# EAGLE board RGB_PMOLED_0.6IN-Panel (EAGLE 9.0.1), part 1 of 2
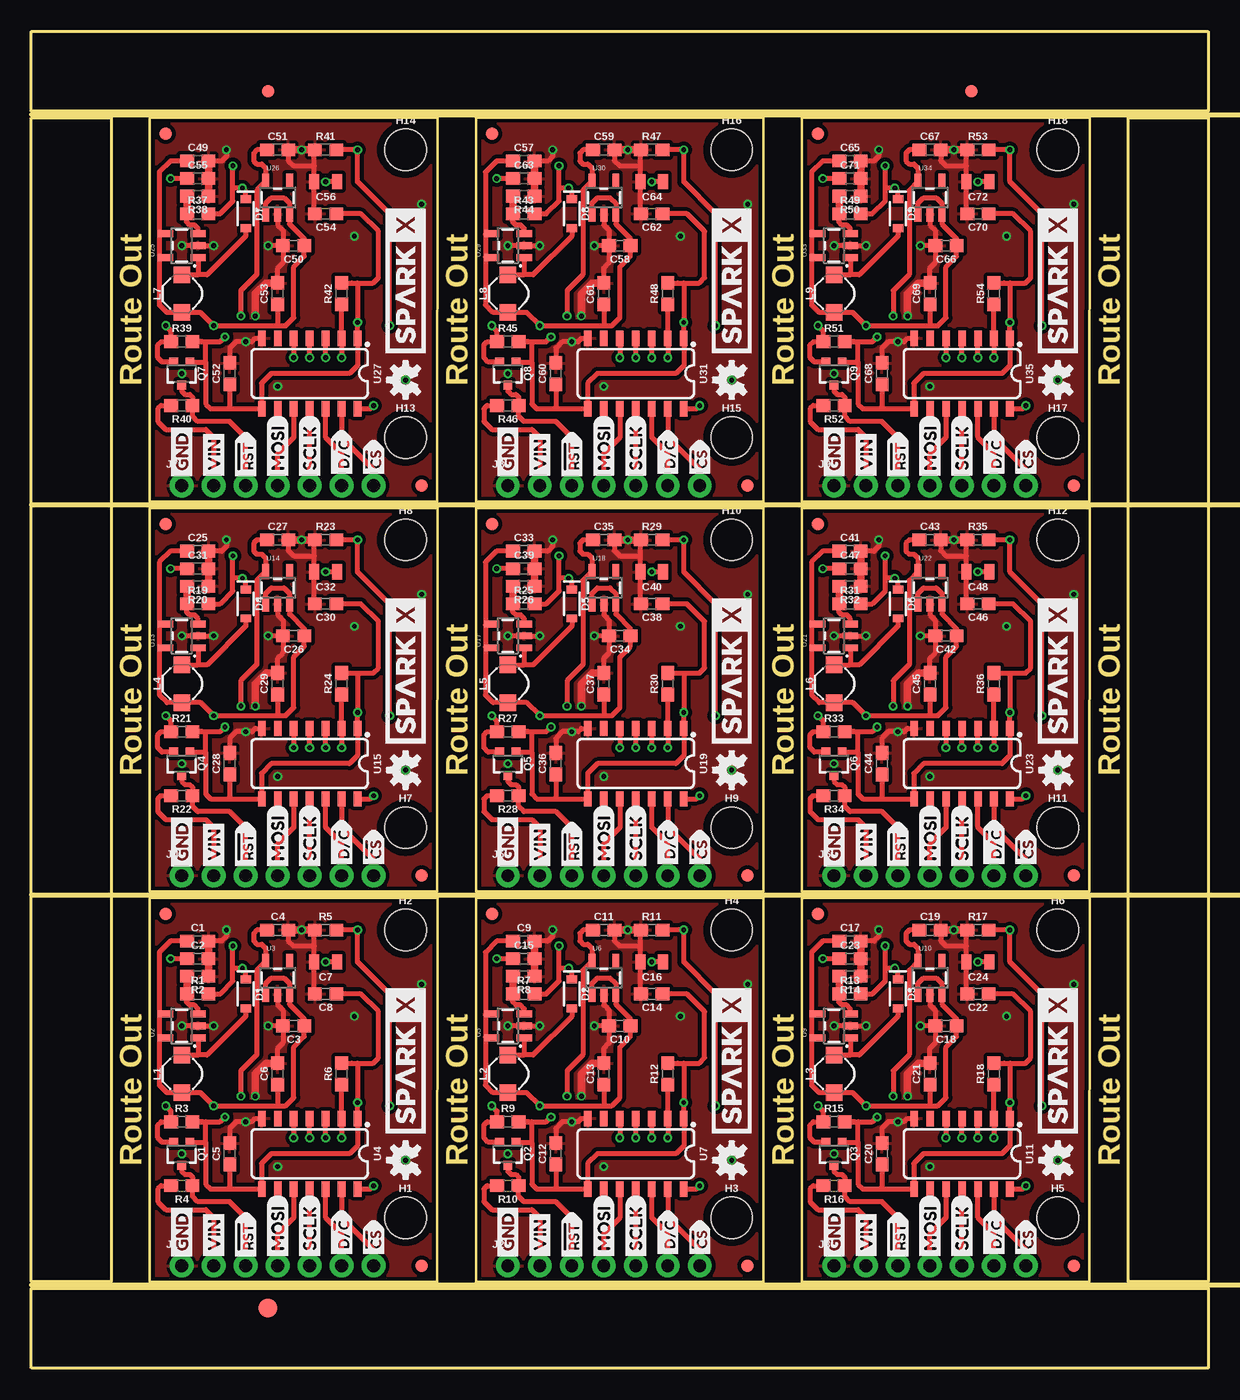
[diagram p0: board, top side]
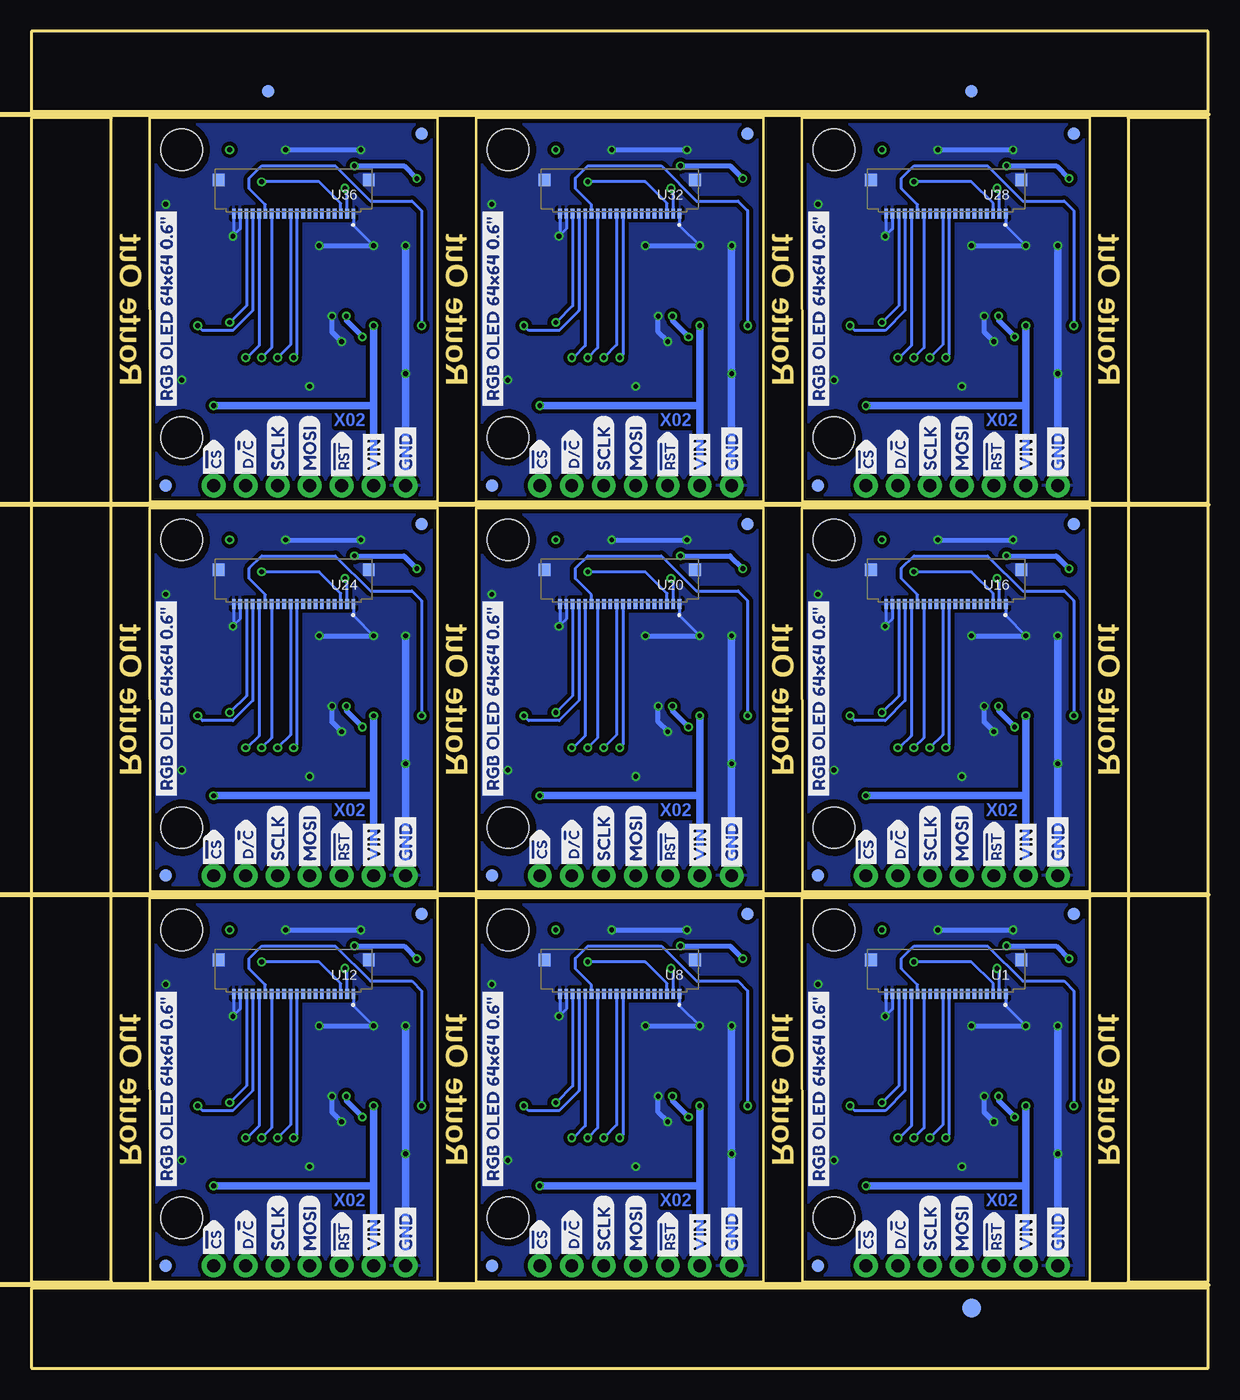
[diagram p1: board, bottom side, seen from below]

Size 93.47 x 106.17 mm. Coordinates in mm from the lower left corner, seen from the top.
Outline: 9.4,6.86 32.24,6.86 32.26,37.34 9.4,37.34 9.4,6.86
Outline: 35.31,6.86 58.15,6.86 58.17,37.34 35.31,37.34 35.31,6.86
Outline: 61.21,6.86 84.05,6.86 84.07,37.34 61.21,37.34 61.21,6.86
Outline: 9.4,37.85 32.24,37.85 32.26,68.33 9.4,68.33 9.4,37.85
Outline: 35.31,37.85 58.15,37.85 58.17,68.33 35.31,68.33 35.31,37.85
Outline: 61.21,37.85 84.05,37.85 84.07,68.33 61.21,68.33 61.21,37.85
Outline: 9.4,68.83 32.24,68.83 32.26,99.31 9.4,99.31 9.4,68.83
Outline: 35.31,68.83 58.15,68.83 58.17,99.31 35.31,99.31 35.31,68.83
Outline: 61.21,68.83 84.05,68.83 84.07,99.31 61.21,99.31 61.21,68.83
Outline: 0,6.35 93.47,6.35 93.47,0 0,0 0,6.35
Outline: 87.12,99.31 93.47,99.31 93.47,6.86 87.12,6.86 87.12,99.31
Outline: 0,106.17 93.47,106.17 93.47,99.82 0,99.82 0,106.17
Outline: 0,99.31 6.35,99.31 6.35,6.86 0,6.86 0,99.31
Copper layers (1*16): Top 0.035mm / dielectric 1.5mm / Bottom 0.035mm
Design rules "SparkFun-2-layer-PCBWay-LIMIT": minimum track width 6mil, minimum drill 0.3mm, track to track 6mil, track to pad 6mil, pad to pad 6mil, via to via 6mil, smd to smd 6mil, copper to edge 6mil, drill to drill 6mil, minimum pad ring 6mil, minimum via ring 6mil, stop-mask expansion 4mil, vias tented up to drill 25mil, thermal gap 10mil
Milling: 4 lines

## Footprints (pad centres in the part's own frame; a part is rotated, then mirrored left to right if it is on the bottom)
0603 = smd 1.1 x 1: 1 -0.85,0; 2 0.85,0
0805 = smd 0.8 x 1.2: 1 -0.9,0; 2 0.9,0
SOD-323 = smd 0.63 x 0.83: A 1.15,0; C -1.15,0
FIDUCIAL-1X2 = smd 1 x 1: 1 0,0
FIDUCIAL-1.5X3 = smd 1.5 x 1.5: 1 0,0
STAND-OFF = hole 3.302: 0,0
1X07_NO_SILK = drill 1.016 pad 1.88: 1 0,0; 2 2.54,0; 3 5.08,0; 4 7.62,0; 5 10.16,0; 6 12.7,0; 7 15.24,0
INDUCTOR_4.7UH = smd 1.3 x 1.3: P$1 -1.5,0; P$2 1.5,0
SOT323 = smd 0.7 x 0.7: 1 -0.65,-0.925; 2 0.65,-0.925; 3 0,0.925
AMPHENOL_10051922-2010ELF = smd 0.3 x 0.8: 1 -4.75,0; 2 -4.25,0; 3 -3.75,0; 4 -3.25,0; 5 -2.75,0; 6 -2.25,0; 7 -1.75,0; 8 -1.25,0; 9 -0.75,0; 10 -0.25,0; 11 0.25,0; 12 0.75,0; 13 1.25,0; 14 1.75,0; 15 2.25,0; 16 2.75,0; 17 3.25,0; 18 3.75,0; 19 4.25,0; 20 4.75,0 | smd 0.95 x 1: P$21 -5.975,-2.7; P$22 5.975,-2.7
SOT23-5 = smd 0.55 x 1.2: 1 -0.95,-1.3; 2 0,-1.3; 3 0.95,-1.3; 4 0.95,1.3; 5 -0.95,1.3
SO14 = smd 0.6 x 1.2: 1 -3.81,-2.8; 2 -2.54,-2.8; 3 -1.27,-2.8; 4 0,-2.8; 5 1.27,-2.8; 6 2.54,-2.8; 7 3.81,-2.8; 8 3.81,2.8; 9 2.54,2.8; 10 1.27,2.8; 11 0,2.8; 12 -1.27,2.8; 13 -2.54,2.8; 14 -3.81,2.8

## Placement (x,y rotation side)
C1  1.0uF  [0603]  13.21,33.91 0 top
C2  1.0uF  [0603]  13.21,32.51 0 top
C3  1.0uF  [0603]  20.83,27.18 180 top
C4  2.2uF  [0603]  19.56,34.8 0 top
C5  0.1uF  [0603]  15.75,17.02 90 top
C6  0.1uF  [0603]  19.56,23.37 90 top
C7  2.2uF  [0805]  23.37,32.26 180 top
C8  1.0uF  [0603]  23.37,29.72 180 top
C9  1.0uF  [0603]  39.12,33.91 0 top
C10  1.0uF  [0603]  46.74,27.18 180 top
C11  2.2uF  [0603]  45.47,34.8 0 top
C12  0.1uF  [0603]  41.66,17.02 90 top
C13  0.1uF  [0603]  45.47,23.37 90 top
C14  1.0uF  [0603]  49.28,29.72 180 top
C15  1.0uF  [0603]  39.12,32.51 0 top
C16  2.2uF  [0805]  49.28,32.26 180 top
C17  1.0uF  [0603]  65.02,33.91 0 top
C18  1.0uF  [0603]  72.64,27.18 180 top
C19  2.2uF  [0603]  71.37,34.8 0 top
C20  0.1uF  [0603]  67.56,17.02 90 top
C21  0.1uF  [0603]  71.37,23.37 90 top
C22  1.0uF  [0603]  75.18,29.72 180 top
C23  1.0uF  [0603]  65.02,32.51 0 top
C24  2.2uF  [0805]  75.18,32.26 180 top
C25  1.0uF  [0603]  13.21,64.9 0 top
C26  1.0uF  [0603]  20.83,58.17 180 top
C27  2.2uF  [0603]  19.56,65.79 0 top
C28  0.1uF  [0603]  15.75,48.01 90 top
C29  0.1uF  [0603]  19.56,54.36 90 top
C30  1.0uF  [0603]  23.37,60.71 180 top
C31  1.0uF  [0603]  13.21,63.5 0 top
C32  2.2uF  [0805]  23.37,63.25 180 top
C33  1.0uF  [0603]  39.12,64.9 0 top
C34  1.0uF  [0603]  46.74,58.17 180 top
C35  2.2uF  [0603]  45.47,65.79 0 top
C36  0.1uF  [0603]  41.66,48.01 90 top
C37  0.1uF  [0603]  45.47,54.36 90 top
C38  1.0uF  [0603]  49.28,60.71 180 top
C39  1.0uF  [0603]  39.12,63.5 0 top
C40  2.2uF  [0805]  49.28,63.25 180 top
C41  1.0uF  [0603]  65.02,64.9 0 top
C42  1.0uF  [0603]  72.64,58.17 180 top
C43  2.2uF  [0603]  71.37,65.79 0 top
C44  0.1uF  [0603]  67.56,48.01 90 top
C45  0.1uF  [0603]  71.37,54.36 90 top
C46  1.0uF  [0603]  75.18,60.71 180 top
C47  1.0uF  [0603]  65.02,63.5 0 top
C48  2.2uF  [0805]  75.18,63.25 180 top
C49  1.0uF  [0603]  13.21,95.89 0 top
C50  1.0uF  [0603]  20.83,89.15 180 top
C51  2.2uF  [0603]  19.56,96.77 0 top
C52  0.1uF  [0603]  15.75,78.99 90 top
C53  0.1uF  [0603]  19.56,85.34 90 top
C54  1.0uF  [0603]  23.37,91.69 180 top
C55  1.0uF  [0603]  13.21,94.49 0 top
C56  2.2uF  [0805]  23.37,94.23 180 top
C57  1.0uF  [0603]  39.12,95.89 0 top
C58  1.0uF  [0603]  46.74,89.15 180 top
C59  2.2uF  [0603]  45.47,96.77 0 top
C60  0.1uF  [0603]  41.66,78.99 90 top
C61  0.1uF  [0603]  45.47,85.34 90 top
C62  1.0uF  [0603]  49.28,91.69 180 top
C63  1.0uF  [0603]  39.12,94.49 0 top
C64  2.2uF  [0805]  49.28,94.23 180 top
C65  1.0uF  [0603]  65.02,95.89 0 top
C66  1.0uF  [0603]  72.64,89.15 180 top
C67  2.2uF  [0603]  71.37,96.77 0 top
C68  0.1uF  [0603]  67.56,78.99 90 top
C69  0.1uF  [0603]  71.37,85.34 90 top
C70  1.0uF  [0603]  75.18,91.69 180 top
C71  1.0uF  [0603]  65.02,94.49 0 top
C72  2.2uF  [0805]  75.18,94.23 180 top
D1  1A/23V/620mV  [SOD-323]  17.02,29.72 270 top
D2  1A/23V/620mV  [SOD-323]  42.93,29.72 270 top
D3  1A/23V/620mV  [SOD-323]  68.83,29.72 270 top
D4  1A/23V/620mV  [SOD-323]  17.02,60.71 270 top
D5  1A/23V/620mV  [SOD-323]  42.93,60.71 270 top
D6  1A/23V/620mV  [SOD-323]  68.83,60.71 270 top
D7  1A/23V/620mV  [SOD-323]  17.02,91.69 270 top
D8  1A/23V/620mV  [SOD-323]  42.93,91.69 270 top
D9  1A/23V/620mV  [SOD-323]  68.83,91.69 270 top
E$1  [FIDUCIAL-1X2]  18.8,101.41 0 top
E$2  [FIDUCIAL-1X2]  18.8,101.41 0 bottom
E$3  [FIDUCIAL-1X2]  74.68,101.41 0 top
E$4  [FIDUCIAL-1X2]  74.68,101.41 0 bottom
E$5  [FIDUCIAL-1.5X3]  18.8,4.76 0 top
E$6  [FIDUCIAL-1.5X3]  18.8,4.76 0 bottom
FD1  FIDUCIAL1X2  [FIDUCIAL-1X2]  10.67,36.07 0 top
FD2  FIDUCIAL1X2  [FIDUCIAL-1X2]  30.99,8.13 0 top
FD3  FIDUCIAL1X2  [FIDUCIAL-1X2]  30.99,8.13 0 bottom
FD4  FIDUCIAL1X2  [FIDUCIAL-1X2]  10.67,36.07 0 bottom
FD5  FIDUCIAL1X2  [FIDUCIAL-1X2]  36.58,36.07 0 top
FD6  FIDUCIAL1X2  [FIDUCIAL-1X2]  56.9,8.13 0 top
FD7  FIDUCIAL1X2  [FIDUCIAL-1X2]  56.9,8.13 0 bottom
FD8  FIDUCIAL1X2  [FIDUCIAL-1X2]  36.58,36.07 0 bottom
FD9  FIDUCIAL1X2  [FIDUCIAL-1X2]  62.48,36.07 0 top
FD10  FIDUCIAL1X2  [FIDUCIAL-1X2]  82.8,8.13 0 top
FD11  FIDUCIAL1X2  [FIDUCIAL-1X2]  82.8,8.13 0 bottom
FD12  FIDUCIAL1X2  [FIDUCIAL-1X2]  62.48,36.07 0 bottom
FD13  FIDUCIAL1X2  [FIDUCIAL-1X2]  10.67,67.06 0 top
FD14  FIDUCIAL1X2  [FIDUCIAL-1X2]  30.99,39.12 0 top
FD15  FIDUCIAL1X2  [FIDUCIAL-1X2]  30.99,39.12 0 bottom
FD16  FIDUCIAL1X2  [FIDUCIAL-1X2]  10.67,67.06 0 bottom
FD17  FIDUCIAL1X2  [FIDUCIAL-1X2]  36.58,67.06 0 top
FD18  FIDUCIAL1X2  [FIDUCIAL-1X2]  56.9,39.12 0 top
FD19  FIDUCIAL1X2  [FIDUCIAL-1X2]  56.9,39.12 0 bottom
FD20  FIDUCIAL1X2  [FIDUCIAL-1X2]  36.58,67.06 0 bottom
FD21  FIDUCIAL1X2  [FIDUCIAL-1X2]  62.48,67.06 0 top
FD22  FIDUCIAL1X2  [FIDUCIAL-1X2]  82.8,39.12 0 top
FD23  FIDUCIAL1X2  [FIDUCIAL-1X2]  82.8,39.12 0 bottom
FD24  FIDUCIAL1X2  [FIDUCIAL-1X2]  62.48,67.06 0 bottom
FD25  FIDUCIAL1X2  [FIDUCIAL-1X2]  10.67,98.04 0 top
FD26  FIDUCIAL1X2  [FIDUCIAL-1X2]  30.99,70.1 0 top
FD27  FIDUCIAL1X2  [FIDUCIAL-1X2]  30.99,70.1 0 bottom
FD28  FIDUCIAL1X2  [FIDUCIAL-1X2]  10.67,98.04 0 bottom
FD29  FIDUCIAL1X2  [FIDUCIAL-1X2]  36.58,98.04 0 top
FD30  FIDUCIAL1X2  [FIDUCIAL-1X2]  56.9,70.1 0 top
FD31  FIDUCIAL1X2  [FIDUCIAL-1X2]  56.9,70.1 0 bottom
FD32  FIDUCIAL1X2  [FIDUCIAL-1X2]  36.58,98.04 0 bottom
FD33  FIDUCIAL1X2  [FIDUCIAL-1X2]  62.48,98.04 0 top
FD34  FIDUCIAL1X2  [FIDUCIAL-1X2]  82.8,70.1 0 top
FD35  FIDUCIAL1X2  [FIDUCIAL-1X2]  82.8,70.1 0 bottom
FD36  FIDUCIAL1X2  [FIDUCIAL-1X2]  62.48,98.04 0 bottom
H1  STAND-OFF  [STAND-OFF]  29.72,11.94 0 top
H2  STAND-OFF  [STAND-OFF]  29.72,34.8 0 top
H3  STAND-OFF  [STAND-OFF]  55.63,11.94 0 top
H4  STAND-OFF  [STAND-OFF]  55.63,34.8 0 top
H5  STAND-OFF  [STAND-OFF]  81.53,11.94 0 top
H6  STAND-OFF  [STAND-OFF]  81.53,34.8 0 top
H7  STAND-OFF  [STAND-OFF]  29.72,42.93 0 top
H8  STAND-OFF  [STAND-OFF]  29.72,65.79 0 top
H9  STAND-OFF  [STAND-OFF]  55.63,42.93 0 top
H10  STAND-OFF  [STAND-OFF]  55.63,65.79 0 top
H11  STAND-OFF  [STAND-OFF]  81.53,42.93 0 top
H12  STAND-OFF  [STAND-OFF]  81.53,65.79 0 top
H13  STAND-OFF  [STAND-OFF]  29.72,73.91 0 top
H14  STAND-OFF  [STAND-OFF]  29.72,96.77 0 top
H15  STAND-OFF  [STAND-OFF]  55.63,73.91 0 top
H16  STAND-OFF  [STAND-OFF]  55.63,96.77 0 top
H17  STAND-OFF  [STAND-OFF]  81.53,73.91 0 top
H18  STAND-OFF  [STAND-OFF]  81.53,96.77 0 top
J1  [1X07_NO_SILK]  11.94,8.13 0 top
J2  [1X07_NO_SILK]  37.85,8.13 0 top
J3  [1X07_NO_SILK]  63.75,8.13 0 top
J4  [1X07_NO_SILK]  11.94,39.12 0 top
J5  [1X07_NO_SILK]  37.85,39.12 0 top
J6  [1X07_NO_SILK]  63.75,39.12 0 top
J7  [1X07_NO_SILK]  11.94,70.1 0 top
J8  [1X07_NO_SILK]  37.85,70.1 0 top
J9  [1X07_NO_SILK]  63.75,70.1 0 top
L1  10uH  [INDUCTOR_4.7UH]  11.94,23.37 90 top
L2  10uH  [INDUCTOR_4.7UH]  37.85,23.37 90 top
L3  10uH  [INDUCTOR_4.7UH]  63.75,23.37 90 top
L4  10uH  [INDUCTOR_4.7UH]  11.94,54.36 90 top
L5  10uH  [INDUCTOR_4.7UH]  37.85,54.36 90 top
L6  10uH  [INDUCTOR_4.7UH]  63.75,54.36 90 top
L7  10uH  [INDUCTOR_4.7UH]  11.94,85.34 90 top
L8  10uH  [INDUCTOR_4.7UH]  37.85,85.34 90 top
L9  10uH  [INDUCTOR_4.7UH]  63.75,85.34 90 top
LOGO1  SPARKX-LOGO5  [SPARKX-LARGE]  29.72,24.38 90 top
LOGO2  OSHW-LOGOS  [OSHW-LOGO-S]  29.72,16.51 90 top
LOGO3  SPARKX-LOGO5  [SPARKX-LARGE]  55.63,24.38 90 top
LOGO4  OSHW-LOGOS  [OSHW-LOGO-S]  55.63,16.51 90 top
LOGO5  SPARKX-LOGO5  [SPARKX-LARGE]  81.53,24.38 90 top
LOGO6  OSHW-LOGOS  [OSHW-LOGO-S]  81.53,16.51 90 top
LOGO7  SPARKX-LOGO5  [SPARKX-LARGE]  29.72,55.37 90 top
LOGO8  OSHW-LOGOS  [OSHW-LOGO-S]  29.72,47.5 90 top
LOGO9  SPARKX-LOGO5  [SPARKX-LARGE]  55.63,55.37 90 top
LOGO10  OSHW-LOGOS  [OSHW-LOGO-S]  55.63,47.5 90 top
LOGO11  SPARKX-LOGO5  [SPARKX-LARGE]  81.53,55.37 90 top
LOGO12  OSHW-LOGOS  [OSHW-LOGO-S]  81.53,47.5 90 top
LOGO13  SPARKX-LOGO5  [SPARKX-LARGE]  29.72,86.36 90 top
LOGO14  OSHW-LOGOS  [OSHW-LOGO-S]  29.72,78.49 90 top
LOGO15  SPARKX-LOGO5  [SPARKX-LARGE]  55.63,86.36 90 top
LOGO16  OSHW-LOGOS  [OSHW-LOGO-S]  55.63,78.49 90 top
LOGO17  SPARKX-LOGO5  [SPARKX-LARGE]  81.53,86.36 90 top
LOGO18  OSHW-LOGOS  [OSHW-LOGO-S]  81.53,78.49 90 top
Q1  310mA/60V/1.6Ω  [SOT323]  11.94,17.02 180 top
Q2  310mA/60V/1.6Ω  [SOT323]  37.85,17.02 180 top
Q3  310mA/60V/1.6Ω  [SOT323]  63.75,17.02 180 top
Q4  310mA/60V/1.6Ω  [SOT323]  11.94,48.01 180 top
Q5  310mA/60V/1.6Ω  [SOT323]  37.85,48.01 180 top
Q6  310mA/60V/1.6Ω  [SOT323]  63.75,48.01 180 top
Q7  310mA/60V/1.6Ω  [SOT323]  11.94,78.99 180 top
Q8  310mA/60V/1.6Ω  [SOT323]  37.85,78.99 180 top
Q9  310mA/60V/1.6Ω  [SOT323]  63.75,78.99 180 top
R1  47k  [0603]  13.21,29.72 0 top
R2  5.6k  [0603]  13.21,31.12 180 top
R3  10k  [0603]  11.94,19.56 0 top
R4  10k  [0603]  11.94,14.48 180 top
R5  390k  [0603]  23.37,34.8 0 top
R6  10k  [0603]  24.64,23.37 90 top
R7  47k  [0603]  39.12,29.72 0 top
R8  5.6k  [0603]  39.12,31.12 180 top
R9  10k  [0603]  37.85,19.56 0 top
R10  10k  [0603]  37.85,14.48 180 top
R11  390k  [0603]  49.28,34.8 0 top
R12  10k  [0603]  50.55,23.37 90 top
R13  47k  [0603]  65.02,29.72 0 top
R14  5.6k  [0603]  65.02,31.12 180 top
R15  10k  [0603]  63.75,19.56 0 top
R16  10k  [0603]  63.75,14.48 180 top
R17  390k  [0603]  75.18,34.8 0 top
R18  10k  [0603]  76.45,23.37 90 top
R19  47k  [0603]  13.21,60.71 0 top
R20  5.6k  [0603]  13.21,62.1 180 top
R21  10k  [0603]  11.94,50.55 0 top
R22  10k  [0603]  11.94,45.47 180 top
R23  390k  [0603]  23.37,65.79 0 top
R24  10k  [0603]  24.64,54.36 90 top
R25  47k  [0603]  39.12,60.71 0 top
R26  5.6k  [0603]  39.12,62.1 180 top
R27  10k  [0603]  37.85,50.55 0 top
R28  10k  [0603]  37.85,45.47 180 top
R29  390k  [0603]  49.28,65.79 0 top
R30  10k  [0603]  50.55,54.36 90 top
R31  47k  [0603]  65.02,60.71 0 top
R32  5.6k  [0603]  65.02,62.1 180 top
R33  10k  [0603]  63.75,50.55 0 top
R34  10k  [0603]  63.75,45.47 180 top
R35  390k  [0603]  75.18,65.79 0 top
R36  10k  [0603]  76.45,54.36 90 top
R37  47k  [0603]  13.21,91.69 0 top
R38  5.6k  [0603]  13.21,93.09 180 top
R39  10k  [0603]  11.94,81.53 0 top
R40  10k  [0603]  11.94,76.45 180 top
R41  390k  [0603]  23.37,96.77 0 top
R42  10k  [0603]  24.64,85.34 90 top
R43  47k  [0603]  39.12,91.69 0 top
R44  5.6k  [0603]  39.12,93.09 180 top
R45  10k  [0603]  37.85,81.53 0 top
R46  10k  [0603]  37.85,76.45 180 top
R47  390k  [0603]  49.28,96.77 0 top
R48  10k  [0603]  50.55,85.34 90 top
R49  47k  [0603]  65.02,91.69 0 top
R50  5.6k  [0603]  65.02,93.09 180 top
R51  10k  [0603]  63.75,81.53 0 top
R52  10k  [0603]  63.75,76.45 180 top
R53  390k  [0603]  75.18,96.77 0 top
R54  10k  [0603]  76.45,85.34 90 top
U1  UG-6464TDDBG01  [AMPHENOL_10051922-2010ELF]  20.83,29.72 180 bottom
U2  AP3012  [SOT23-5]  11.94,27.18 90 top
U3  3.3V  [SOT23-5]  19.56,30.99 0 top
U4  TXB0104  [SO14]  22.1,17.02 180 top
U5  AP3012  [SOT23-5]  37.85,27.18 90 top
U6  3.3V  [SOT23-5]  45.47,30.99 0 top
U7  TXB0104  [SO14]  48.01,17.02 180 top
U8  UG-6464TDDBG01  [AMPHENOL_10051922-2010ELF]  46.74,29.72 180 bottom
U9  AP3012  [SOT23-5]  63.75,27.18 90 top
U10  3.3V  [SOT23-5]  71.37,30.99 0 top
U11  TXB0104  [SO14]  73.91,17.02 180 top
U12  UG-6464TDDBG01  [AMPHENOL_10051922-2010ELF]  72.64,29.72 180 bottom
U13  AP3012  [SOT23-5]  11.94,58.17 90 top
U14  3.3V  [SOT23-5]  19.56,61.98 0 top
U15  TXB0104  [SO14]  22.1,48.01 180 top
U16  UG-6464TDDBG01  [AMPHENOL_10051922-2010ELF]  20.83,60.71 180 bottom
U17  AP3012  [SOT23-5]  37.85,58.17 90 top
U18  3.3V  [SOT23-5]  45.47,61.98 0 top
U19  TXB0104  [SO14]  48.01,48.01 180 top
U20  UG-6464TDDBG01  [AMPHENOL_10051922-2010ELF]  46.74,60.71 180 bottom
U21  AP3012  [SOT23-5]  63.75,58.17 90 top
U22  3.3V  [SOT23-5]  71.37,61.98 0 top
U23  TXB0104  [SO14]  73.91,48.01 180 top
U24  UG-6464TDDBG01  [AMPHENOL_10051922-2010ELF]  72.64,60.71 180 bottom
U25  AP3012  [SOT23-5]  11.94,89.15 90 top
U26  3.3V  [SOT23-5]  19.56,92.96 0 top
U27  TXB0104  [SO14]  22.1,78.99 180 top
U28  UG-6464TDDBG01  [AMPHENOL_10051922-2010ELF]  20.83,91.69 180 bottom
U29  AP3012  [SOT23-5]  37.85,89.15 90 top
U30  3.3V  [SOT23-5]  45.47,92.96 0 top
U31  TXB0104  [SO14]  48.01,78.99 180 top
U32  UG-6464TDDBG01  [AMPHENOL_10051922-2010ELF]  46.74,91.69 180 bottom
U33  AP3012  [SOT23-5]  63.75,89.15 90 top
U34  3.3V  [SOT23-5]  71.37,92.96 0 top
U35  TXB0104  [SO14]  73.91,78.99 180 top
U36  UG-6464TDDBG01  [AMPHENOL_10051922-2010ELF]  72.64,91.69 180 bottom
U$1  [VIN0]  14.48,8.38 90 top
U$2  [VIN0]  14.48,8.38 90 bottom
U$3  [MOSI1]  19.56,8.38 90 bottom
U$4  [MOSI1]  19.56,8.38 90 top
U$5  [SCLK2]  22.1,8.38 90 top
U$6  [SCLK2]  22.1,8.38 90 bottom
U$7  [GND1]  11.94,8.38 90 top
U$8  [GND1]  11.94,8.38 90 bottom
U$9  [D##C5]  24.64,8.38 90 top
U$10  [#RST0]  17.02,8.25 90 top
U$11  [#RST0]  17.02,8.25 90 bottom
U$12  [#CS6]  27.18,8.38 90 top
U$13  [#CS6]  27.18,8.38 90 bottom
U$14  [D##C5]  24.64,8.38 90 bottom
U$15  [VIN0]  40.39,8.38 90 top
U$16  [RGB_OLED_64X64_0#6#7]  30.93,13.96 90 bottom
U$17  [VIN0]  40.39,8.38 90 bottom
U$18  [GND1]  37.85,8.38 90 top
U$19  [GND1]  37.85,8.38 90 bottom
U$20  [#CS6]  53.09,8.38 90 top
U$21  [#CS6]  53.09,8.38 90 bottom
U$22  [D##C5]  50.55,8.38 90 bottom
U$23  [D##C5]  50.55,8.38 90 top
U$24  [RGB_OLED_64X64_0#6#7]  56.84,13.96 90 bottom
U$25  [#RST0]  42.93,8.25 90 top
U$26  [#RST0]  42.93,8.25 90 bottom
U$27  [MOSI1]  45.47,8.38 90 bottom
U$28  [MOSI1]  45.47,8.38 90 top
U$29  [SCLK2]  48.01,8.38 90 top
U$30  [SCLK2]  48.01,8.38 90 bottom
U$31  [VIN0]  66.29,8.38 90 top
U$32  [VIN0]  66.29,8.38 90 bottom
U$33  [GND1]  63.75,8.38 90 top
U$34  [GND1]  63.75,8.38 90 bottom
U$35  [#CS6]  78.99,8.38 90 top
U$36  [#CS6]  78.99,8.38 90 bottom
U$37  [D##C5]  76.45,8.38 90 bottom
U$38  [D##C5]  76.45,8.38 90 top
U$39  [RGB_OLED_64X64_0#6#7]  82.74,13.96 90 bottom
U$40  [#RST0]  68.83,8.25 90 top
U$41  [#RST0]  68.83,8.25 90 bottom
U$42  [MOSI1]  71.37,8.38 90 bottom
U$43  [MOSI1]  71.37,8.38 90 top
U$44  [SCLK2]  73.91,8.38 90 top
U$45  [SCLK2]  73.91,8.38 90 bottom
U$46  [VIN0]  14.48,39.37 90 top
U$47  [VIN0]  14.48,39.37 90 bottom
U$48  [GND1]  11.94,39.37 90 top
U$49  [GND1]  11.94,39.37 90 bottom
U$50  [#CS6]  27.18,39.37 90 top
U$51  [#CS6]  27.18,39.37 90 bottom
U$52  [D##C5]  24.64,39.37 90 bottom
U$53  [D##C5]  24.64,39.37 90 top
U$54  [RGB_OLED_64X64_0#6#7]  30.93,44.95 90 bottom
U$55  [#RST0]  17.02,39.24 90 top
U$56  [#RST0]  17.02,39.24 90 bottom
U$57  [MOSI1]  19.56,39.37 90 bottom
U$58  [MOSI1]  19.56,39.37 90 top
U$59  [SCLK2]  22.1,39.37 90 top
U$60  [SCLK2]  22.1,39.37 90 bottom
U$61  [VIN0]  40.39,39.37 90 top
U$62  [VIN0]  40.39,39.37 90 bottom
U$63  [GND1]  37.85,39.37 90 top
U$64  [GND1]  37.85,39.37 90 bottom
U$65  [#CS6]  53.09,39.37 90 top
U$66  [#CS6]  53.09,39.37 90 bottom
U$67  [D##C5]  50.55,39.37 90 bottom
U$68  [D##C5]  50.55,39.37 90 top
U$69  [RGB_OLED_64X64_0#6#7]  56.84,44.95 90 bottom
U$70  [#RST0]  42.93,39.24 90 top
U$71  [#RST0]  42.93,39.24 90 bottom
U$72  [MOSI1]  45.47,39.37 90 bottom
U$73  [MOSI1]  45.47,39.37 90 top
U$74  [SCLK2]  48.01,39.37 90 top
U$75  [SCLK2]  48.01,39.37 90 bottom
U$76  [VIN0]  66.29,39.37 90 top
U$77  [VIN0]  66.29,39.37 90 bottom
U$78  [GND1]  63.75,39.37 90 top
U$79  [GND1]  63.75,39.37 90 bottom
U$80  [#CS6]  78.99,39.37 90 top
U$81  [#CS6]  78.99,39.37 90 bottom
U$82  [D##C5]  76.45,39.37 90 bottom
U$83  [D##C5]  76.45,39.37 90 top
U$84  [RGB_OLED_64X64_0#6#7]  82.74,44.95 90 bottom
U$85  [#RST0]  68.83,39.24 90 top
U$86  [#RST0]  68.83,39.24 90 bottom
U$87  [MOSI1]  71.37,39.37 90 bottom
U$88  [MOSI1]  71.37,39.37 90 top
U$89  [SCLK2]  73.91,39.37 90 top
U$90  [SCLK2]  73.91,39.37 90 bottom
U$91  [VIN0]  14.48,70.36 90 top
U$92  [VIN0]  14.48,70.36 90 bottom
U$93  [GND1]  11.94,70.36 90 top
U$94  [GND1]  11.94,70.36 90 bottom
U$95  [#CS6]  27.18,70.36 90 top
U$96  [#CS6]  27.18,70.36 90 bottom
U$97  [D##C5]  24.64,70.36 90 bottom
U$98  [D##C5]  24.64,70.36 90 top
U$99  [RGB_OLED_64X64_0#6#7]  30.93,75.94 90 bottom
U$100  [#RST0]  17.02,70.23 90 top
U$101  [#RST0]  17.02,70.23 90 bottom
U$102  [MOSI1]  19.56,70.36 90 bottom
U$103  [MOSI1]  19.56,70.36 90 top
U$104  [SCLK2]  22.1,70.36 90 top
U$105  [SCLK2]  22.1,70.36 90 bottom
U$106  [VIN0]  40.39,70.36 90 top
U$107  [VIN0]  40.39,70.36 90 bottom
U$108  [GND1]  37.85,70.36 90 top
U$109  [GND1]  37.85,70.36 90 bottom
U$110  [#CS6]  53.09,70.36 90 top
U$111  [#CS6]  53.09,70.36 90 bottom
U$112  [D##C5]  50.55,70.36 90 bottom
U$113  [D##C5]  50.55,70.36 90 top
U$114  [RGB_OLED_64X64_0#6#7]  56.84,75.94 90 bottom
U$115  [#RST0]  42.93,70.23 90 top
U$116  [#RST0]  42.93,70.23 90 bottom
U$117  [MOSI1]  45.47,70.36 90 bottom
U$118  [MOSI1]  45.47,70.36 90 top
U$119  [SCLK2]  48.01,70.36 90 top
U$120  [SCLK2]  48.01,70.36 90 bottom
U$121  [VIN0]  66.29,70.36 90 top
U$122  [VIN0]  66.29,70.36 90 bottom
U$123  [GND1]  63.75,70.36 90 top
U$124  [GND1]  63.75,70.36 90 bottom
U$125  [#CS6]  78.99,70.36 90 top
U$126  [#CS6]  78.99,70.36 90 bottom
U$127  [D##C5]  76.45,70.36 90 bottom
U$128  [D##C5]  76.45,70.36 90 top
U$129  [RGB_OLED_64X64_0#6#7]  82.74,75.94 90 bottom
U$130  [#RST0]  68.83,70.23 90 top
U$131  [#RST0]  68.83,70.23 90 bottom
U$132  [MOSI1]  71.37,70.36 90 bottom
U$133  [MOSI1]  71.37,70.36 90 top
U$134  [SCLK2]  73.91,70.36 90 top
U$135  [SCLK2]  73.91,70.36 90 bottom

## Library data of the parts
C1-C3 C8-C10 C14 C15 C17 C18 C22 C23 C25 C26 C30 C31 C33 C34 C38 C39 C41 C42 C46 C47 C49 C50 C54 C55 C57 C58 C62 C63 C65 C66 C70 C71 = SparkFun-Capacitors; PROD_ID: CAP-00868
C4 C11 C19 C27 C35 C43 C51 C59 C67 = SparkFun-Capacitors; PROD_ID: CAP-07888
C5 C6 C12 C13 C20 C21 C28 C29 C36 C37 C44 C45 C52 C53 C60 C61 C68 C69 = SparkFun-Capacitors; PROD_ID: CAP-00810
C7 C16 C24 C32 C40 C48 C56 C64 C72 = SparkFun-Capacitors; PROD_ID: CAP-11624
D1-D9 = SparkFun-DiscreteSemi; PROD_ID: DIO-11623
E$1-E$4 FD1-FD36 LOGO2 LOGO4 LOGO6 LOGO8 LOGO10 LOGO12 LOGO14 LOGO16 LOGO18 = SparkFun-Aesthetics
E$5 E$6 = SparkFun-Retired
H1-H18 = SparkFun-Hardware
J1-J9 = SparkFun-Connectors
L1-L9 = SparkFun-Coils; PROD_ID: NDUC-13968
LOGO1 LOGO3 LOGO5 LOGO7 LOGO9 LOGO11 LOGO13 LOGO15 LOGO17 = 1.81_Greyscale_OLED_Breakout
Q1-Q9 = SparkFun-DiscreteSemi; PROD_ID: TRANS-11151
R1 R7 R13 R19 R25 R31 R37 R43 R49 = SparkFun-Resistors; PROD_ID: RES-07871
R2 R8 R14 R20 R26 R32 R38 R44 R50 = SparkFun-Resistors; PROD_ID: RES-12378
R3 R4 R6 R9 R10 R12 R15 R16 R18 R21 R22 R24 R27 R28 R30 R33 R34 R36 R39 R40 R42 R45 R46 R48 R51 R52 R54 = SparkFun-Resistors; PROD_ID: RES-00824
R5 R11 R17 R23 R29 R35 R41 R47 R53 = SparkFun-Resistors; PROD_ID: RES-12024
U1 U8 U12 U16 U20 U24 U28 U32 U36 = RGB_OLED
U2 U5 U9 U13 U17 U21 U25 U29 U33 = SparkFun-IC-Power; PROD_ID: VREG-13911
U3 U6 U10 U14 U18 U22 U26 U30 U34 = SparkFun-IC-Power; PROD_ID: VREG-12457
U4 U7 U11 U15 U19 U23 U27 U31 U35 = SparkFun-IC-Comms; PROD_ID: IC-11329
U$1-U$135 = buzzard_labels

## Nets
3.3V: C4.1 C5.1 C8.1 Q1.1 R3.2 R6.2 U1.18 U3.5 U4.1 U4.8
3.3V1: C11.1 C12.1 C14.1 Q2.1 R9.2 R12.2 U6.5 U7.1 U7.8 U8.18
3.3V2: C19.1 C20.1 C22.1 Q3.1 R15.2 R18.2 U10.5 U11.1 U11.8 U12.18
3.3V3: C27.1 C28.1 C30.1 Q4.1 R21.2 R24.2 U14.5 U15.1 U15.8 U16.18
3.3V4: C35.1 C36.1 C38.1 Q5.1 R27.2 R30.2 U18.5 U19.1 U19.8 U20.18
3.3V5: C43.1 C44.1 C46.1 Q6.1 R33.2 R36.2 U22.5 U23.1 U23.8 U24.18
3.3V6: C51.1 C52.1 C54.1 Q7.1 R39.2 R42.2 U26.5 U27.1 U27.8 U28.18
3.3V7: C59.1 C60.1 C62.1 Q8.1 R45.2 R48.2 U30.5 U31.1 U31.8 U32.18
3.3V8: C67.1 C68.1 C70.1 Q9.1 R51.2 R54.2 U34.5 U35.1 U35.8 U36.18
12V: C2.1 D1.C R1.2 U1.2
12V1: C15.1 D2.C R7.2 U8.2
12V2: C23.1 D3.C R13.2 U12.2
12V3: C31.1 D4.C R19.2 U16.2
12V4: C39.1 D5.C R25.2 U20.2
12V5: C47.1 D6.C R31.2 U24.2
12V6: C55.1 D7.C R37.2 U28.2
12V7: C63.1 D8.C R43.2 U32.2
12V8: C71.1 D9.C R49.2 U36.2
!CS: R6.1 U1.16 U4.2
!CS1: R12.1 U7.2 U8.16
!CS2: R18.1 U11.2 U12.16
!CS3: R24.1 U15.2 U16.16
!CS4: R30.1 U19.2 U20.16
!CS5: R36.1 U23.2 U24.16
!CS6: R42.1 U27.2 U28.16
!CS7: R48.1 U31.2 U32.16
!CS8: R54.1 U35.2 U36.16
!CS!_HIGH: J1.7 U4.13
!CS!_HIGH1: J2.7 U7.13
!CS!_HIGH2: J3.7 U11.13
!CS!_HIGH3: J4.7 U15.13
!CS!_HIGH4: J5.7 U19.13
!CS!_HIGH5: J6.7 U23.13
!CS!_HIGH6: J7.7 U27.13
!CS!_HIGH7: J8.7 U31.13
!CS!_HIGH8: J9.7 U35.13
!RES: Q1.2 R3.1 U1.15
!RES1: Q2.2 R9.1 U8.15
!RES2: Q3.2 R15.1 U12.15
!RES3: Q4.2 R21.1 U16.15
!RES4: Q5.2 R27.1 U20.15
!RES5: Q6.2 R33.1 U24.15
!RES6: Q7.2 R39.1 U28.15
!RES7: Q8.2 R45.1 U32.15
!RES8: Q9.2 R51.1 U36.15
!RES!_HIGH: J1.3 Q1.3 R4.1
!RES!_HIGH1: J2.3 Q2.3 R10.1
!RES!_HIGH2: J3.3 Q3.3 R16.1
!RES!_HIGH3: J4.3 Q4.3 R22.1
!RES!_HIGH4: J5.3 Q5.3 R28.1
!RES!_HIGH5: J6.3 Q6.3 R34.1
!RES!_HIGH6: J7.3 Q7.3 R40.1
!RES!_HIGH7: J8.3 Q8.3 R46.1
!RES!_HIGH8: J9.3 Q9.3 R52.1
D/!C: U1.14 U4.3
D/!C1: U7.3 U8.14
D/!C2: U11.3 U12.14
D/!C3: U15.3 U16.14
D/!C4: U19.3 U20.14
D/!C5: U23.3 U24.14
D/!C6: U27.3 U28.14
D/!C7: U31.3 U32.14
D/!C8: U35.3 U36.14
D/!C!_HIGH: J1.6 U4.12
D/!C!_HIGH1: J2.6 U7.12
D/!C!_HIGH2: J3.6 U11.12
D/!C!_HIGH3: J4.6 U15.12
D/!C!_HIGH4: J5.6 U19.12
D/!C!_HIGH5: J6.6 U23.12
D/!C!_HIGH6: J7.6 U27.12
D/!C!_HIGH7: J8.6 U31.12
D/!C!_HIGH8: J9.6 U35.12
GND: C1.2 C2.2 C3.2 C4.2 C5.2 C6.2 C7.2 C8.2 J1.1 R2.1 R5.1 U1.1 U1.19 U1.20 U1.P$21 U1.P$22 U2.2 U3.2 U4.7
GND1: C9.2 C10.2 C11.2 C12.2 C13.2 C14.2 C15.2 C16.2 J2.1 R8.1 R11.1 U5.2 U6.2 U7.7 U8.1 U8.19 U8.20 U8.P$21 U8.P$22
GND2: C17.2 C18.2 C19.2 C20.2 C21.2 C22.2 C23.2 C24.2 J3.1 R14.1 R17.1 U9.2 U10.2 U11.7 U12.1 U12.19 U12.20 U12.P$21 U12.P$22
GND3: C25.2 C26.2 C27.2 C28.2 C29.2 C30.2 C31.2 C32.2 J4.1 R20.1 R23.1 U13.2 U14.2 U15.7 U16.1 U16.19 U16.20 U16.P$21 U16.P$22
GND4: C33.2 C34.2 C35.2 C36.2 C37.2 C38.2 C39.2 C40.2 J5.1 R26.1 R29.1 U17.2 U18.2 U19.7 U20.1 U20.19 U20.20 U20.P$21 U20.P$22
GND5: C41.2 C42.2 C43.2 C44.2 C45.2 C46.2 C47.2 C48.2 J6.1 R32.1 R35.1 U21.2 U22.2 U23.7 U24.1 U24.19 U24.20 U24.P$21 U24.P$22
GND6: C49.2 C50.2 C51.2 C52.2 C53.2 C54.2 C55.2 C56.2 J7.1 R38.1 R41.1 U25.2 U26.2 U27.7 U28.1 U28.19 U28.20 U28.P$21 U28.P$22
GND7: C57.2 C58.2 C59.2 C60.2 C61.2 C62.2 C63.2 C64.2 J8.1 R44.1 R47.1 U29.2 U30.2 U31.7 U32.1 U32.19 U32.20 U32.P$21 U32.P$22
GND8: C65.2 C66.2 C67.2 C68.2 C69.2 C70.2 C71.2 C72.2 J9.1 R50.1 R53.1 U33.2 U34.2 U35.7 U36.1 U36.19 U36.20 U36.P$21 U36.P$22
N$1: D2.A L2.P$2 U5.1
N$2: D1.A L1.P$2 U2.1
N$3: R1.1 R2.2 U2.3
N$4: R7.1 R8.2 U5.3
N$5: C7.1 U1.3
N$6: R11.2 U8.17
N$7: C16.1 U8.3
N$8: D3.A L3.P$2 U9.1
N$9: R13.1 R14.2 U9.3
N$10: R17.2 U12.17
N$11: R5.2 U1.17
N$12: C24.1 U12.3
N$13: D4.A L4.P$2 U13.1
N$14: R19.1 R20.2 U13.3
N$15: R23.2 U16.17
N$16: C32.1 U16.3
N$17: D5.A L5.P$2 U17.1
N$18: R25.1 R26.2 U17.3
N$19: R29.2 U20.17
N$20: C40.1 U20.3
N$21: D6.A L6.P$2 U21.1
N$22: R31.1 R32.2 U21.3
N$23: R35.2 U24.17
N$24: C48.1 U24.3
N$25: D7.A L7.P$2 U25.1
N$26: R37.1 R38.2 U25.3
N$27: R41.2 U28.17
N$28: C56.1 U28.3
N$29: D8.A L8.P$2 U29.1
N$30: R43.1 R44.2 U29.3
N$31: R47.2 U32.17
N$32: C64.1 U32.3
N$33: D9.A L9.P$2 U33.1
N$34: R49.1 R50.2 U33.3
N$35: R53.2 U36.17
N$36: C72.1 U36.3
SCLK: U1.11 U4.4
SCLK1: U7.4 U8.11
SCLK2: U11.4 U12.11
SCLK3: U15.4 U16.11
SCLK4: U19.4 U20.11
SCLK5: U23.4 U24.11
SCLK6: U27.4 U28.11
SCLK7: U31.4 U32.11
SCLK8: U35.4 U36.11
SCLK_HIGH: J1.5 U4.11
SCLK_HIGH1: J2.5 U7.11
SCLK_HIGH2: J3.5 U11.11
SCLK_HIGH3: J4.5 U15.11
SCLK_HIGH4: J5.5 U19.11
SCLK_HIGH5: J6.5 U23.11
SCLK_HIGH6: J7.5 U27.11
SCLK_HIGH7: J8.5 U31.11
SCLK_HIGH8: J9.5 U35.11
SDIN: U1.10 U4.5
SDIN1: U7.5 U8.10
SDIN2: U11.5 U12.10
SDIN3: U15.5 U16.10
SDIN4: U19.5 U20.10
SDIN5: U23.5 U24.10
SDIN6: U27.5 U28.10
SDIN7: U31.5 U32.10
SDIN8: U35.5 U36.10
SDIN_HIGH: J1.4 U4.10
SDIN_HIGH1: J2.4 U7.10
SDIN_HIGH2: J3.4 U11.10
SDIN_HIGH3: J4.4 U15.10
SDIN_HIGH4: J5.4 U19.10
SDIN_HIGH5: J6.4 U23.10
SDIN_HIGH6: J7.4 U27.10
SDIN_HIGH7: J8.4 U31.10
SDIN_HIGH8: J9.4 U35.10
VIN: C1.1 C3.1 C6.1 J1.2 L1.P$1 R4.2 U2.4 U2.5 U3.1 U3.3 U4.14
VIN1: C9.1 C10.1 C13.1 J2.2 L2.P$1 R10.2 U5.4 U5.5 U6.1 U6.3 U7.14
VIN2: C17.1 C18.1 C21.1 J3.2 L3.P$1 R16.2 U9.4 U9.5 U10.1 U10.3 U11.14
VIN3: C25.1 C26.1 C29.1 J4.2 L4.P$1 R22.2 U13.4 U13.5 U14.1 U14.3 U15.14
VIN4: C33.1 C34.1 C37.1 J5.2 L5.P$1 R28.2 U17.4 U17.5 U18.1 U18.3 U19.14
VIN5: C41.1 C42.1 C45.1 J6.2 L6.P$1 R34.2 U21.4 U21.5 U22.1 U22.3 U23.14
VIN6: C49.1 C50.1 C53.1 J7.2 L7.P$1 R40.2 U25.4 U25.5 U26.1 U26.3 U27.14
VIN7: C57.1 C58.1 C61.1 J8.2 L8.P$1 R46.2 U29.4 U29.5 U30.1 U30.3 U31.14
VIN8: C65.1 C66.1 C69.1 J9.2 L9.P$1 R52.2 U33.4 U33.5 U34.1 U34.3 U35.14